# Altium PCB PCB1.2.PcbDoc (part 1 of 2)
Units mm, origin at the board's own origin, x right, y up, seen from the top; angles counter-clockwise.
Board outline 43 x 43 mm, 4 copper layers (Top Layer, Mid-Layer 1, Mid-Layer 2, Bottom Layer); 150 components, 103 nets, 523 pads, 244 vias.
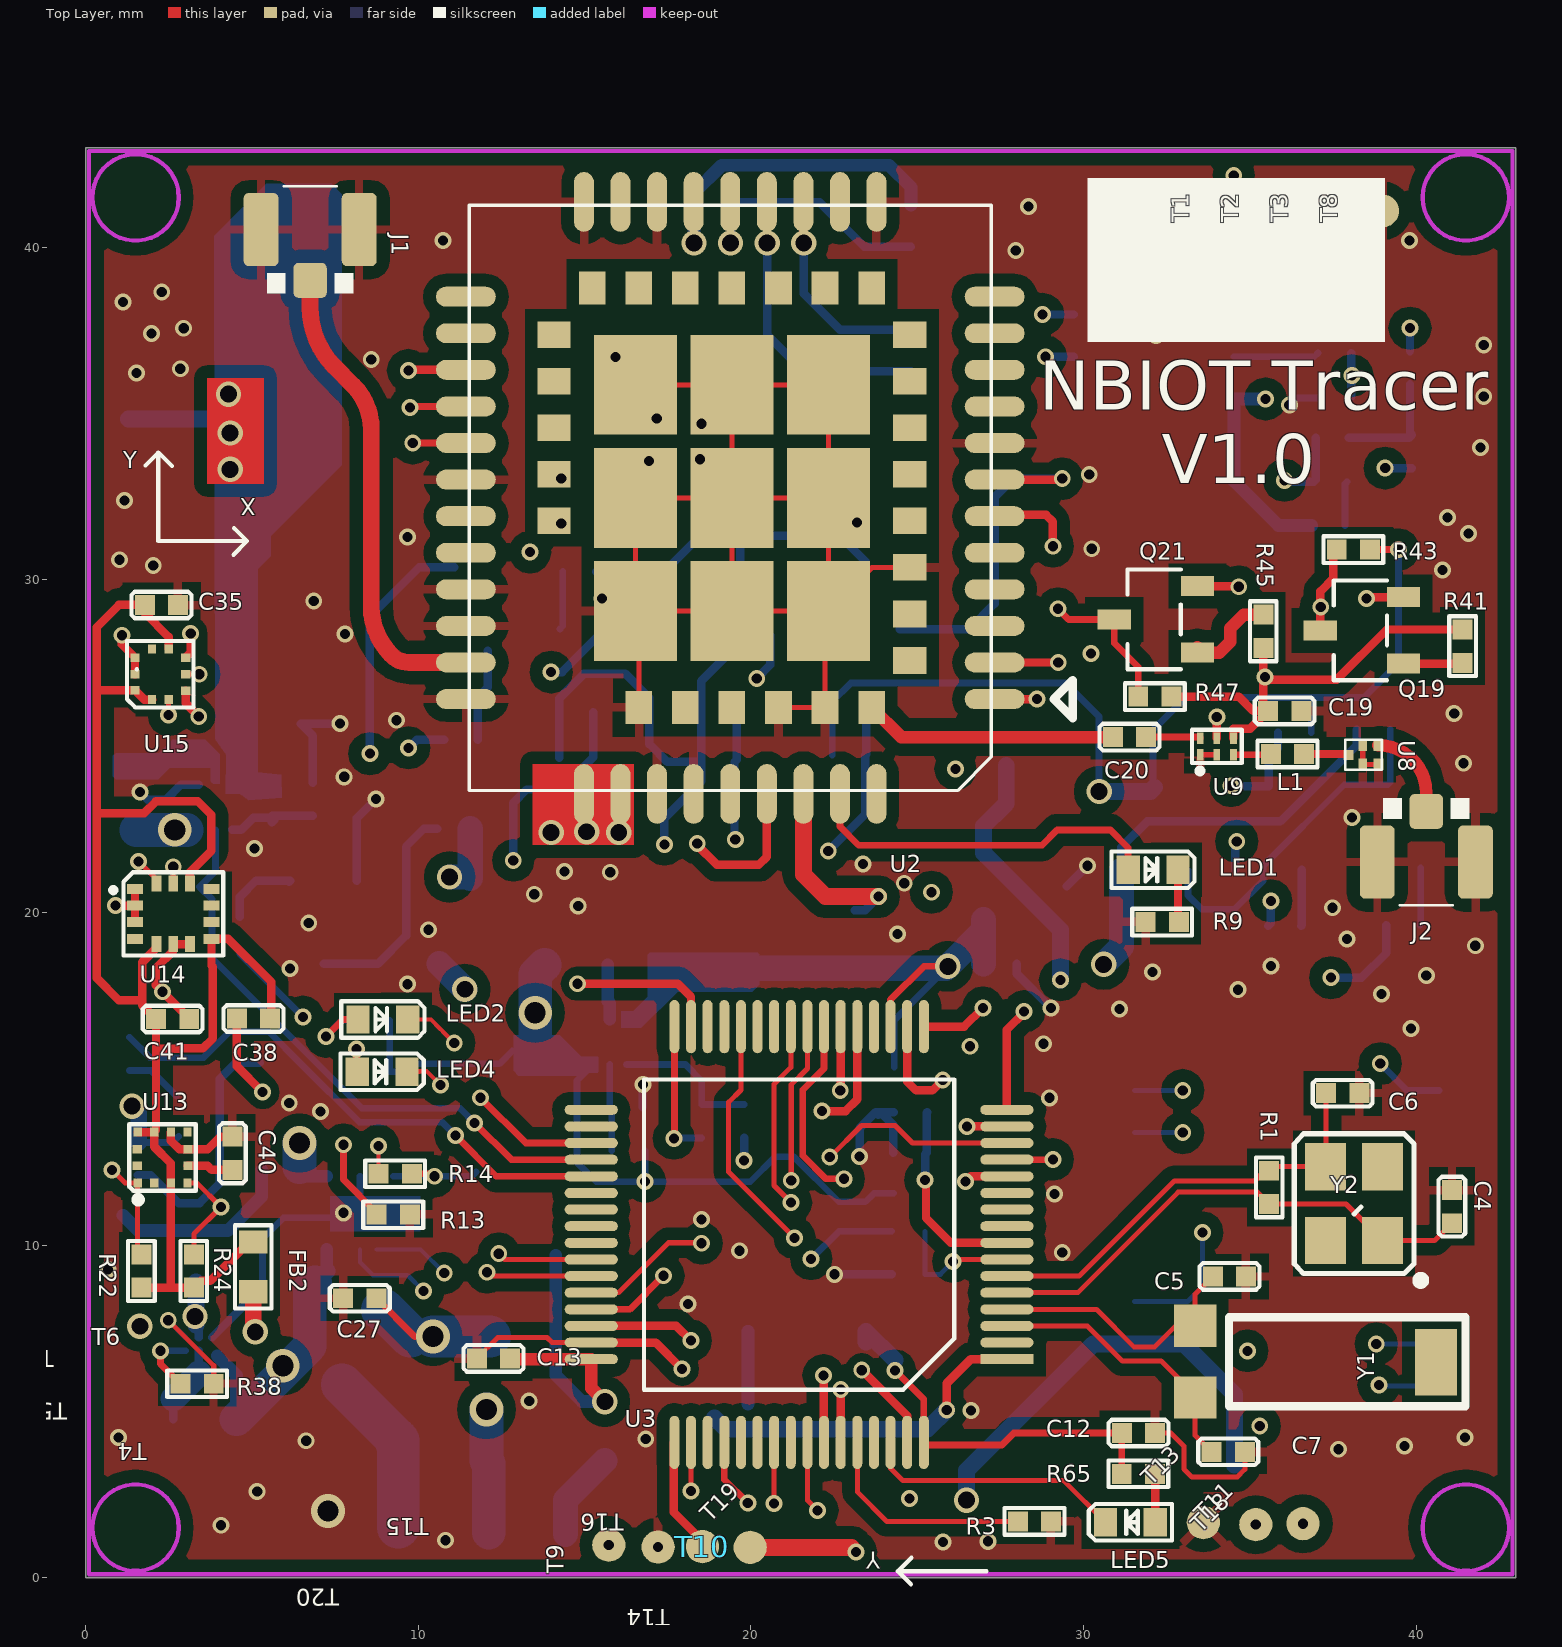
[diagram p0: Top Layer view]
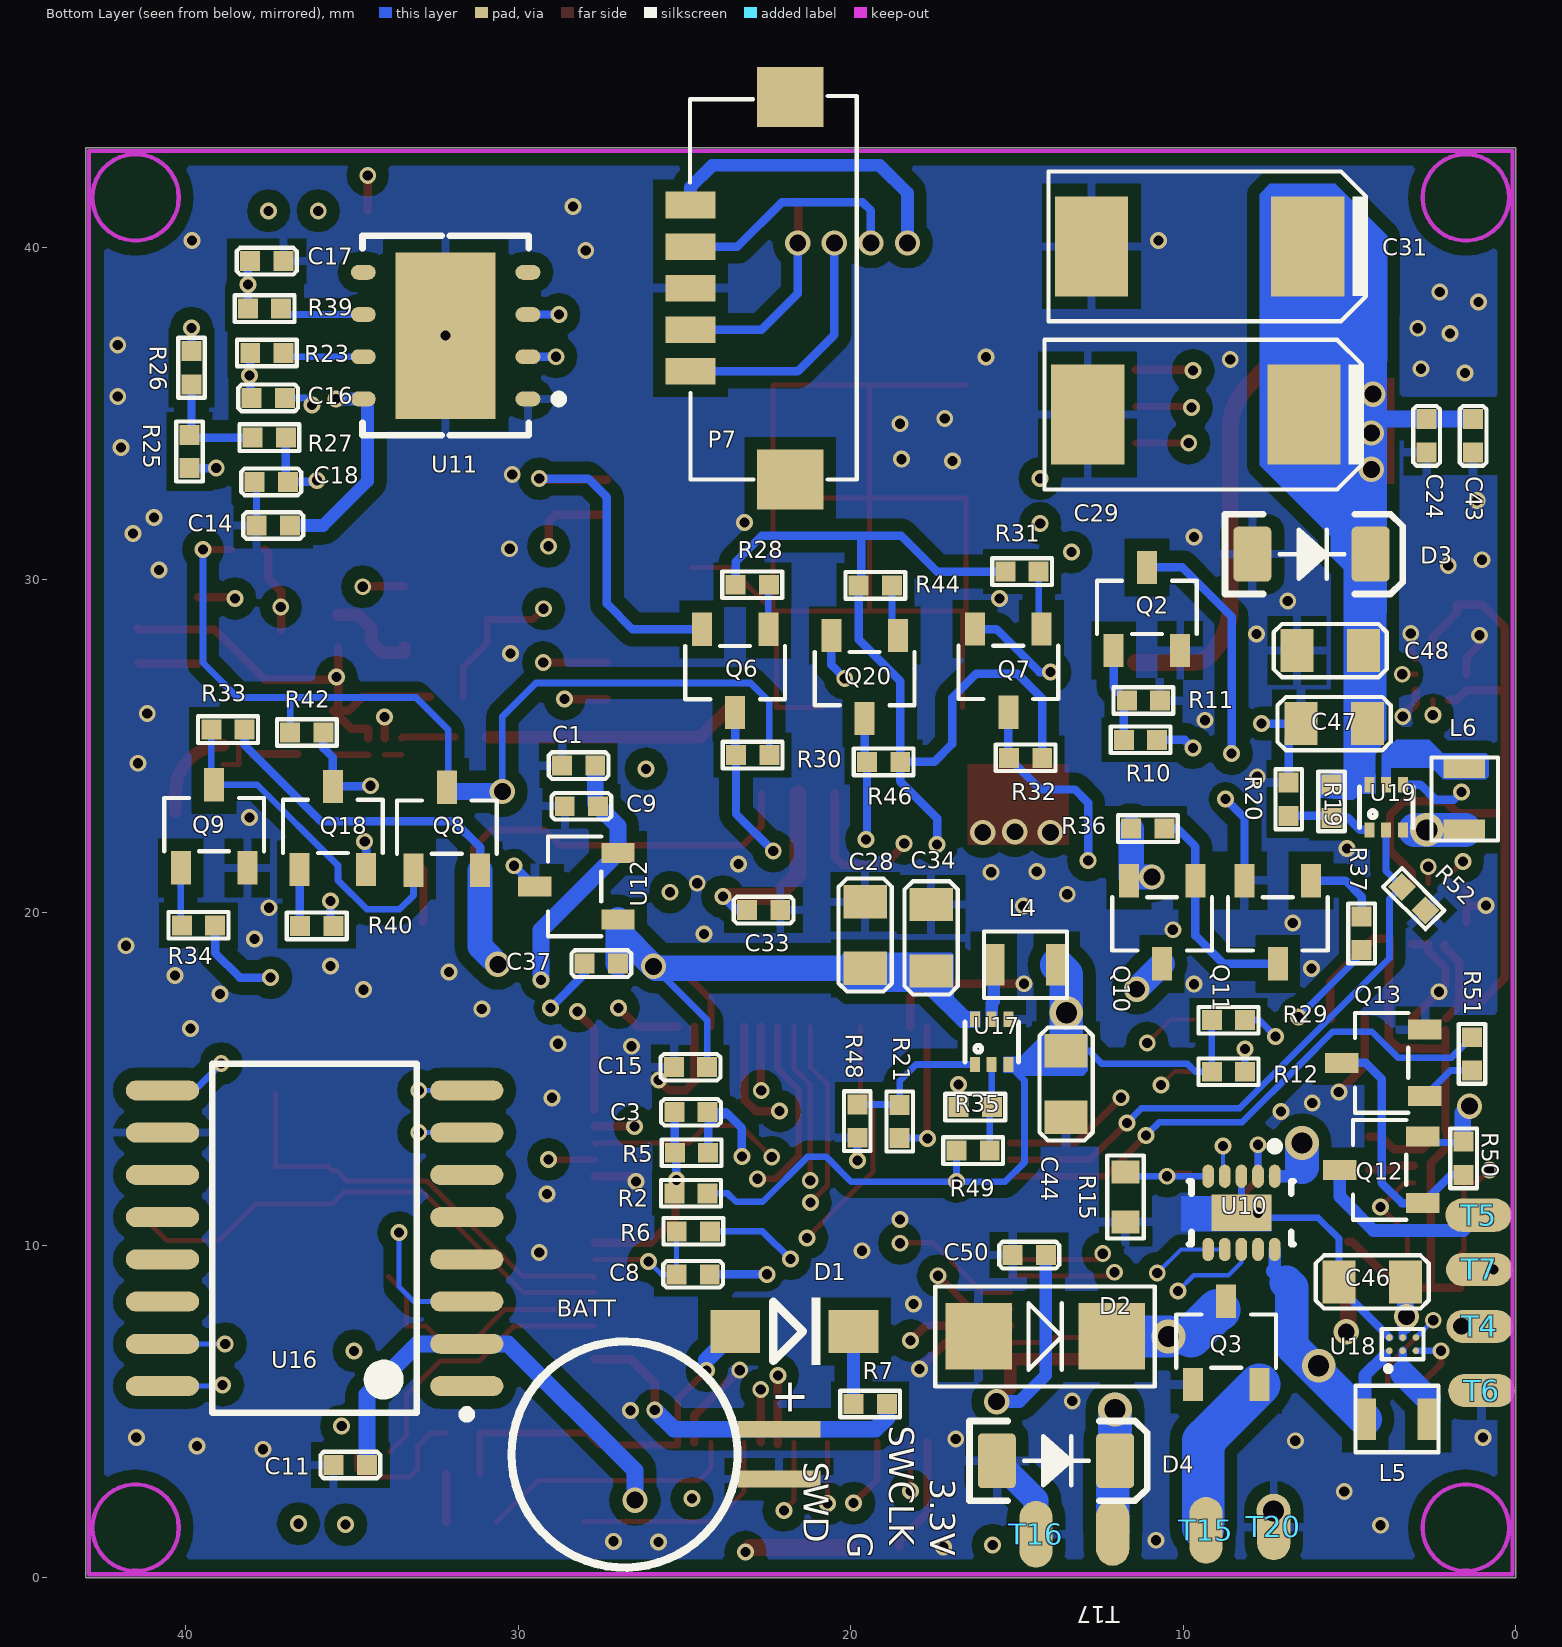
[diagram p1: Bottom Layer view, seen from below]
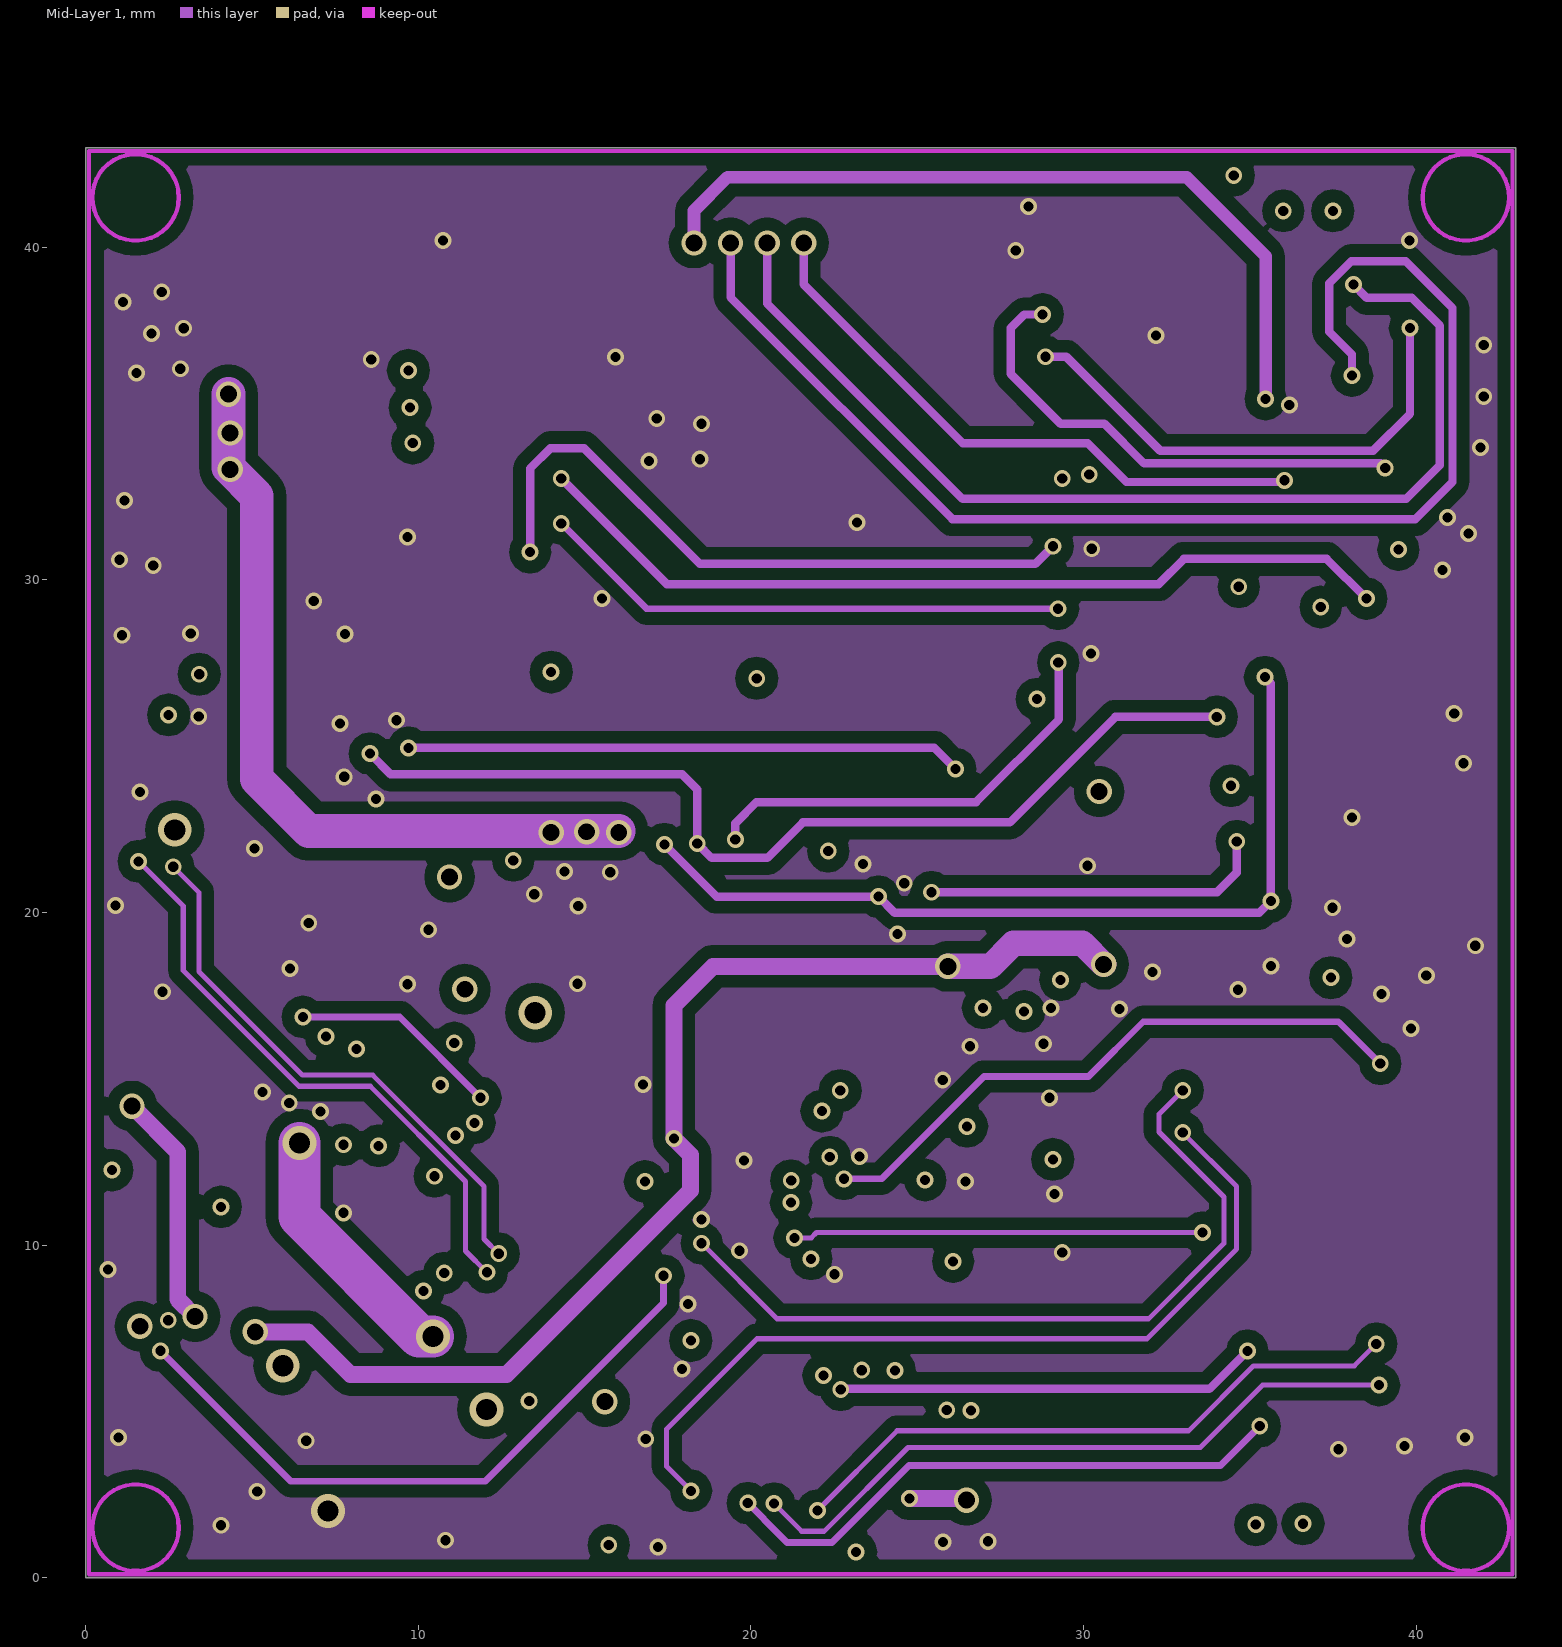
[diagram p2: Mid-Layer 1]
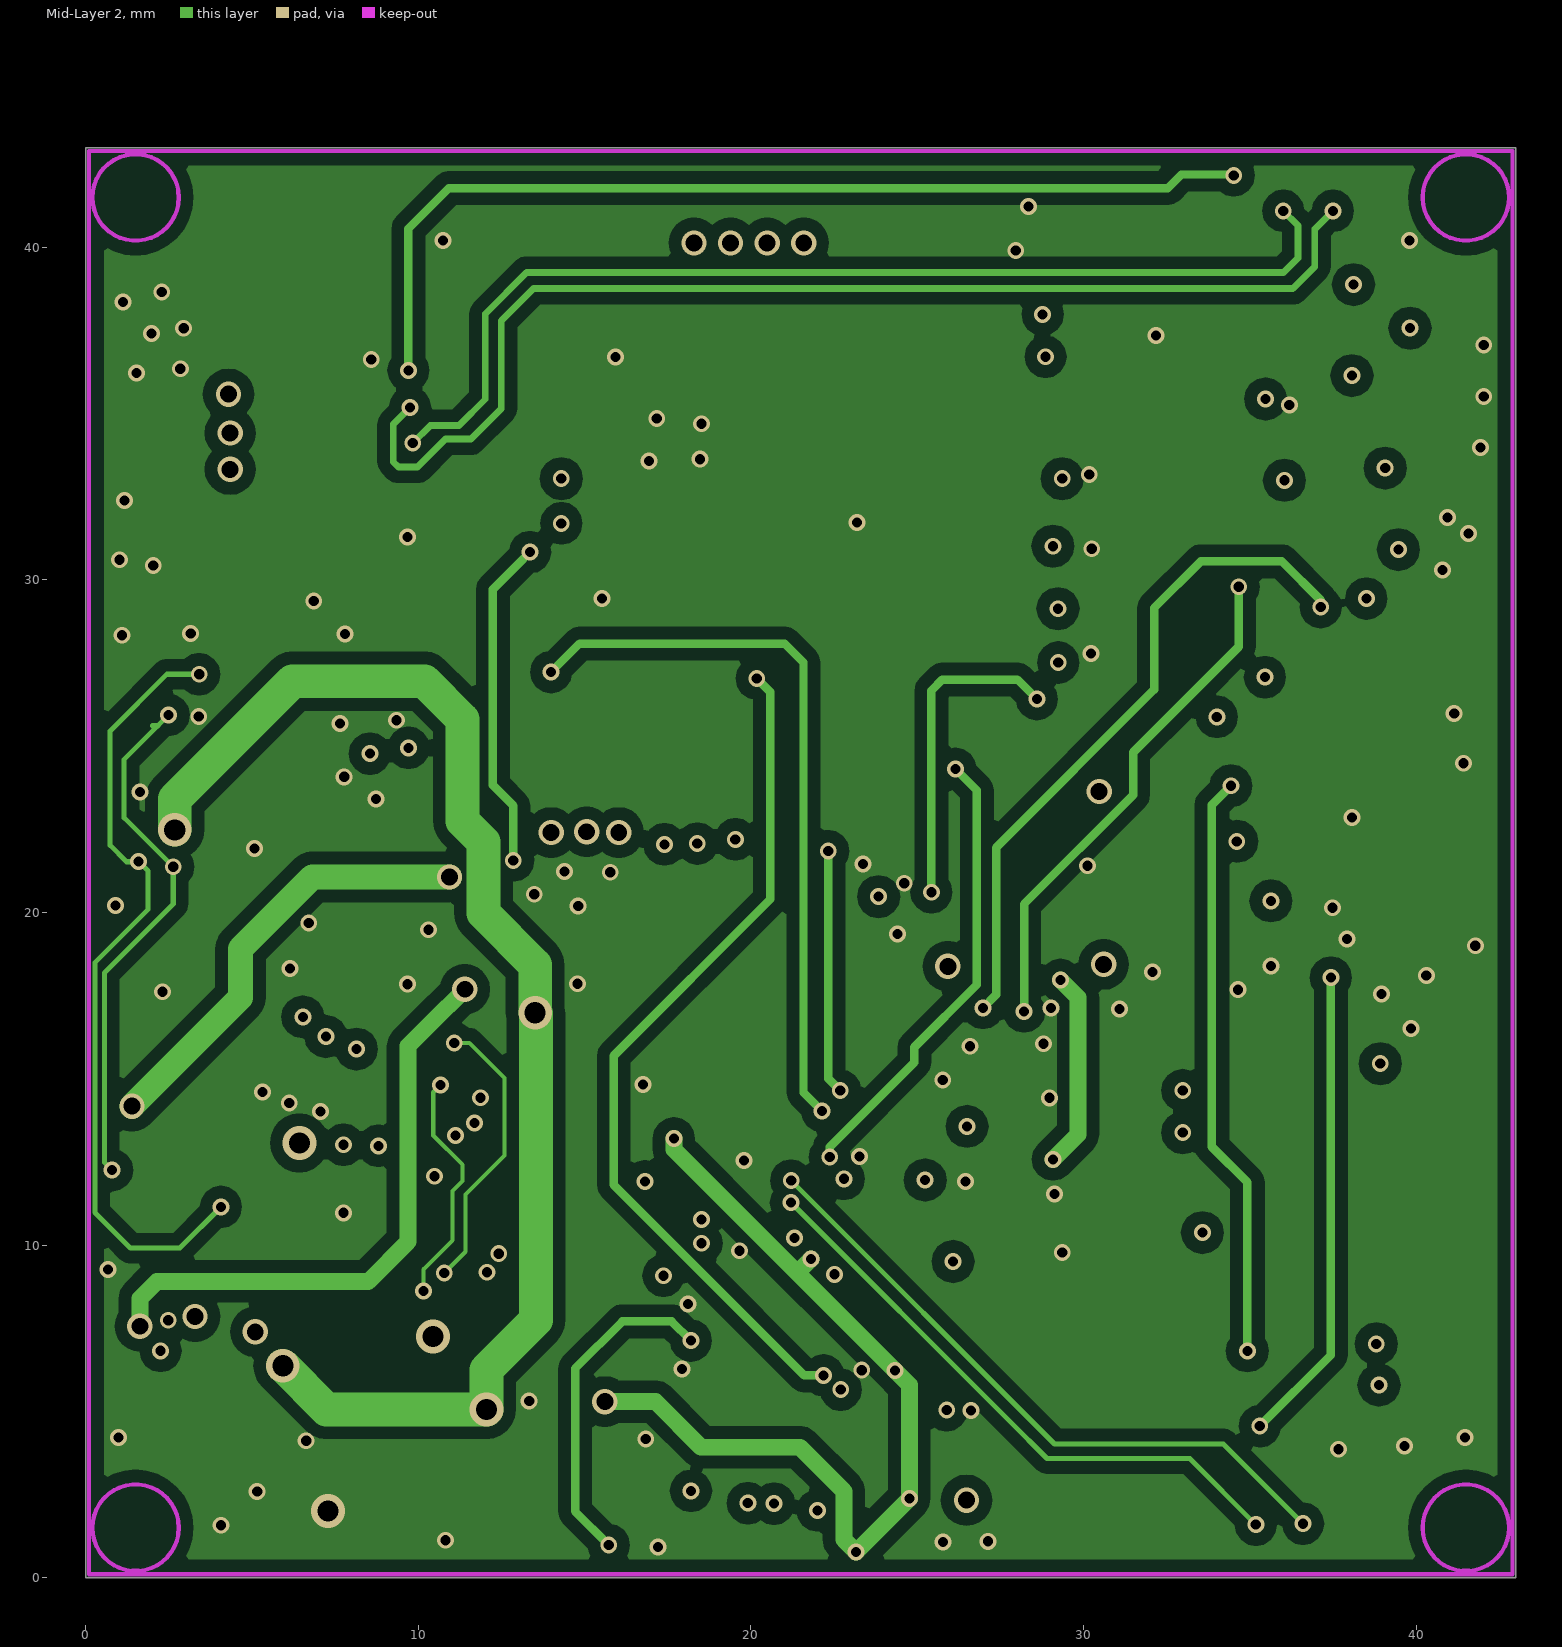
[diagram p3: Mid-Layer 2]

## Layer stack, top to bottom
Top Layer: signal copper 0.0356
Dielectric: core 0.32, FR-4, Dk 4.8
Mid-Layer 1: signal copper 0.0356
Dielectric: prepreg 0.32, FR-4, Dk 4.8
Mid-Layer 2: signal copper 0.0356
Dielectric: core 0.32, FR-4, Dk 4.8
Bottom Layer: signal copper 0.0356

## Board outline
0,0 0,43 43,43 43,0

## Design rules (kind name [scope] priority, off if disabled: settings)
Clearance [InPolygon  And InNet(AGND)] p1: gap=0.381
Clearance Clearance_1 [All] p2: gap=0.127
HoleToHoleClearance [All] p1: gap=0.127 allowstackedmicrovias=TRUE
MinimumSolderMaskSliver [All] p1: minsoldermaskwidth=0.025
PolygonConnect PolygonConnect_1 [InNet('AGND') And IsVia] p1: connectstyle=Direct reliefconductorwidth=0.254 reliefentries=4 polygonreliefangle="90 Angle"
PolygonConnect [All] p2: connectstyle=Relief reliefconductorwidth=0.254 reliefentries=4 polygonreliefangle="90 Angle"
RoutingVias [All] p1: holewidth=0.711 width=1.27 viastyle="Through Hole" minholewidth=0.711 minwidth=1.27 maxholewidth=0.711 maxwidth=1.27
SilkToSilkClearance [All] p1: silktosilkclearance=0.127
SilkscreenOverComponentPads [All] p1: minsilkscreentomaskgap=0.025
SolderMaskExpansion [All] p1: expansion=0.102
Width [All] p1: maxlimit=5.08 minlimit=0.127 preferedwidth=0.254
24 further rules are at their usual default settings.

## Classes and differential pairs
component class NBIOT: U2
component class CPU: BATT C3 C4 C5 C6 C7 C8 C9 C11 C12 C13 C15 C50 D1 LED5 R1 R2 R3 R5 R6 R7 R65 T9 T10 T11 T13 T14 T18 T19 U3 U16 U? Y1 Y2
component class GPS&&lte2: C14 C16 C17 C18 C19 C20 C24 C29 C31 C33 C43 D3 J1 J2 L1 LED1 P7 Q2 Q6 Q7 Q18 Q19 Q20 Q21 R9 R10 R11 R23 R25 R26 R27 R28 R30 R31 R32 R39 R40 R41 R42 R43 R44 R45 R46 R47 T1 T2 T3 T8 U8 U9 U11
component class power: C1 C27 C28 C34 C37 C44 C46 C47 C48 D2 D4 L4 L5 L6 LED2 LED4 Q3 Q8 Q9 Q10 Q11 Q12 Q13 R12 R13 R14 R15 R19 R20 R21 R29 R33 R34 R35 R36 R37 R38 R48 R49 R50 R51 R52 T4 T5 T6 T7 T15 T16 T17 T20 U10 U12 U17 U18 U19
component class sensors: C35 C38 C40 C41 FB2 R22 R24 U13 U14 U15

## Components (designator, comment, footprint, x,y, rotation, side; value= is the part's Value field where it differs from the comment)
BATT "MS621FE" MS621FE 22.149,3.714 r180 bottom
C1 "0.1uF/25V" 0402c 27.679,24.417 r0 bottom
C3 "0.1uF/25v" 0402c 25.299,13.994 r180 bottom
C4 "22pF" 0402c 41.079,11.656 r270 top
C5 "6pF" 0402c 33.894,9.059 r0 top
C6 "22pF" 0402c 38.295,14.566 r180 top
C7 "6pF" 0402c 33.853,3.783 r0 top
C8 "0.1uF/25V" 0402C 24.235,9.12 r0 bottom
C9 "0.1uF/25V" 0402C 28.595,23.195 r180 bottom
C11 "0.1uF/25V" 0402C 35.544,3.386 r180 bottom
C12 "0.1uF/25V" 0402C 32.154,4.348 r180 top
C13 "0.1uF/25V" 0402C 11.76,6.593 r0 top
C14 "0.1uF" 0402C 37.861,31.636 r180 bottom
C15 "0.1uF/25V" 0402C 25.314,15.348 r180 bottom
C16 "10pF/NC" 0402C 37.014,35.472 r0 bottom
C17 "10pF/NC" 0402C 37.057,39.584 r0 bottom
C18 "10pF/NC" 0402C 37.922,32.948 r180 bottom
C19 "0.1uF" 0402C 36.551,26.06 r180 top
C20 "36pF" 0402c 30.886,25.273 r0 top
C24 "10pF" 0402C 2.68,33.833 r90 bottom
C27 "1uF/25V" 0402C 8.741,8.401 r180 top
C28 "22uF/10V" 0805C 19.561,18.321 r90 bottom
C29 "1000uF" 7343 6.371,34.972 r0 bottom
C31 "1000uF" 7343 6.254,40.028 r0 bottom
C33 "0.1uF/25V" 0402C 22.117,20.072 r0 bottom
C34 "22uF/10V" 0805C 17.577,18.238 r90 bottom
C35 "0.1uF/25V" 0402C 2.778,29.246 r180 top
C37 "0.1uF/25V" 0402c 26.996,18.462 r0 bottom
C38 "0.1uF/25V" 0402C 4.544,16.811 r0 top
C40 "22pF" 0402c 4.411,12.259 r90 top
C41 "0.1uF/25V" 0402C 3.113,16.797 r180 top
C43 "33pF" 0402C 1.283,33.833 r90 bottom
C44 "22uF/10V" 0805C 13.52,15.841 r270 bottom
C46 "22uF/10V" 0805C 3.317,8.891 r0 bottom
C47 "22uF/10V" 0805C 4.462,25.679 r0 bottom
C48 "22uF/10V" 0805C 4.58,27.874 r0 bottom
C50 "0.1uF/25V" 0402C 15.129,9.697 r180 bottom
D1 "1N4148" DIODE_SOP 23.468,7.404 r180 bottom
D2 "SMAJ12CA" SMA 16.153,7.251 r180 bottom
D3 "DIODE_SCHOTTKY_0" LL-34(D1206) 6.142,30.774 r180 bottom
D4 "DIODE_SCHOTTKY_0" LL-34(D1206) 13.825,3.513 r180 bottom
FB2 "10R/1A" 0603R 5.037,8.594 r90 top
J1 "IPEX" RF-UFL 6.748,40.533 r0 top
J2 "IPEX" RF-UFL 40.31,21.514 r180 top
L1 "LQW15A" 0402R 35.636,24.765 r0 top
L4 "SRP4020TA-1R0M" L2520 15.7,18.422 r180 bottom
L5 "SRP4020TA-2R2M" L2520 4.532,4.762 r180 bottom
L6 "SRP4020TA-1R0M" L2520 1.544,24.373 r270 bottom
LED1 "LED" 0603LED 31.344,21.285 r0 top
LED2 "LED" 0603LED 8.187,16.781 r0 top
LED4 "LED" 0603LED 8.164,15.211 r0 top
LED5 "LED" 0603LED 32.161,1.664 r180 top
P7 "Header 5" 5×1.25mmSMT 24.816,36.271 r90 bottom
Q2 "MMBT3904" SOT23-3 12.09,27.876 r270 bottom
Q3 "Si2369DS" sot23-3 9.707,5.81 r270 bottom
Q6 "MMBT3904" SOT23-3 22.474,28.514 r90 bottom
Q7 "MMBT3904" SOT23-3 14.259,28.521 r90 bottom
Q8 "Si2369DS" sot23-3 33.143,21.266 r270 bottom
Q9 "S8050" SOT23-3 40.141,21.342 r270 bottom
Q10 "Si2369DS" sot23-3 9.633,20.957 r90 bottom
Q11 "S8050" SOT23-3 6.156,20.957 r90 bottom
Q12 "Si2369DS" sot23-3 2.794,11.263 r180 bottom
Q13 "S8050" SOT23-3 2.736,14.479 r180 bottom
Q18 "MMBT3904" SOT23-3 36.569,21.29 r270 bottom
Q19 "MMBT3904" SOT23-3 39.624,27.483 r0 top
Q20 "MMBT3904" SOT23-3 18.578,28.331 r90 bottom
Q21 "MMBT3904" SOT23-3 33.426,27.813 r0 top
R1 "1MR" 0402R 35.585,11.235 r90 top
R2 "10K/1%" 0402R 24.299,11.556 r0 bottom
R3 "100K" 0402R 28.027,1.691 r0 top
R5 "10K/1%" 0402R 25.283,12.775 r180 bottom
R6 "10K" 0402R 24.228,10.413 r0 bottom
R7 "470" 0402R 19.912,5.22 r180 bottom
R9 "1K" 0402R 32.868,19.71 r180 top
R10 "4.7K" 0402R 11.782,25.191 r180 bottom
R11 "47K" 0402R 11.697,26.374 r180 bottom
R12 "1K/1%" 0402R 9.139,15.211 r180 bottom
R13 "3.95K/1%" 0402R 8.748,10.912 r0 top
R14 "21.5k/1%" 0402R 9.805,12.144 r180 top
R15 "RTH103AT" 0603R 11.737,10.694 r90 bottom
R19 "534K/1%" 0402R 5.54,23.843 r270 bottom
R20 "100K/1%" 0402R 6.829,23.906 r270 bottom
R21 "400K/1%" 0402R 18.524,13.215 r90 bottom
R22 "4.7K" 0402R 1.676,8.72 r90 top
R23 "10R" 0402R 38.052,36.823 r180 bottom
R24 "4.7K" 0402R 3.251,9.72 r270 top
R25 "0R" 0402R 39.88,33.363 r90 bottom
R26 "0R" 0402R 39.819,36.878 r270 bottom
R27 "10R" 0402R 36.979,34.279 r0 bottom
R28 "4.7K" 0402R 22.457,29.855 r0 bottom
R29 "1K/1%" 0402R 9.139,16.761 r180 bottom
R30 "10K" 0402R 23.446,24.732 r180 bottom
R31 "4.7K" 0402R 14.344,30.25 r0 bottom
R32 "4.7K" 0402R 15.238,24.65 r180 bottom
R33 "4K7" 0402R 38.223,25.499 r0 bottom
R34 "4K7" 0402R 40.109,19.614 r180 bottom
R35 "10K/1%" 0402R 16.754,14.148 r180 bottom
R36 "4K7" 0402R 11.564,22.521 r180 bottom
R37 "4K7" 0402R 4.637,19.873 r270 bottom
R38 "10K/1%" 0402R 3.851,5.829 r180 top
R39 "10R" 0402R 38.121,38.156 r180 bottom
R40 "4.7K" 0402R 36.553,19.597 r180 bottom
R41 "4.7K" 0402R 41.402,27.508 r90 top
R42 "10K" 0402R 35.851,25.411 r0 bottom
R43 "10K" 0402R 37.617,30.912 r0 top
R44 "4.7K" 0402R 18.757,29.836 r0 bottom
R45 "4.7K" 0402R 35.408,28.956 r270 top
R46 "4.7K" 0402R 19.508,24.528 r180 bottom
R47 "4.7K" 0402R 31.648,26.492 r0 top
R48 "100K/1%" 0402R 19.799,13.226 r90 bottom
R49 "13K/1%" 0402R 16.817,12.839 r180 bottom
R50 "4K7" 0402R 1.568,13.107 r270 bottom
R51 "4K7" 0402R 1.317,15.249 r90 bottom
R52 "10K/1%" 0402R 2.716,20.064 r45 bottom
R65 "1K" 0402R 32.152,3.122 r180 top
T1 "TPD" TPD 34.519,41.097 r90 top
T2 "TPD" TPD 36.009,41.097 r90 top
T3 "TPD" TPD 37.499,41.097 r90 top
T4 "TPD" TP#1 1.085,7.554 r180 top
T5 "TPD" TP#1 1.119,10.897 r180 top
T6 "TPD" TP#1 1.031,5.624 r0 top
T7 "TPD" TP#1 1.096,9.267 r180 top
T8 "TPD" TPD 38.989,41.097 r90 top
T9 "TPD" TPd 15.729,0.977 r90 top
T10 "TPD" TPd 18.544,0.932 r270 top
T11 "TPD" TPd 36.602,1.622 r135 top
T13 "TPD" TPd 33.605,1.654 r135 top
T14 "TPD" TPd 17.213,0.921 r270 top
T15 "TPD" TP#1 9.312,1.421 r270 top
T16 "TPD" TP#1 14.425,1.304 r270 top
T17 "TPD" TP#2 12.12,1.355 r270 bottom
T18 "TPD" TPd 35.183,1.593 r135 top
T19 "TPD" TPd 19.98,0.911 r135 top
T20 "TPD" TP#1 7.277,1.526 r270 top
U2 "SIM7080G" SIM868 27.33,26.416 r180 top
U3 "stm32l412r8t6" LQFP-64 27.701,6.567 r180 top
U8 "SAFFB1G56KB0F0A" SAFFB1G56KB0F0A 37.973,24.74 r0 top
U9 "AW5005DNR" AW5005 34.011,24.994 r90 top
U10 "bq24210" QFN50P200X300X80-10N 8.25,10.969 r270 bottom
U11 "SLI76CF3600P" QFN127P500X600X80-8N 32.177,37.345 r0 bottom
U12 "REF3025AIDBZR" SOT23-3 26.996,19.783 r180 bottom
U13 "LIS2MDL" LIS2MDL 2.312,12.633 r90 top
U14 "LSM6DS3TR" LSM6DS3TR-C 2.633,19.959 r0 top
U15 "BMP388" BMP388 2.245,27.164 r180 top
U16 "MX25L51245GMI-10G" SOP127P1030X239-16N 36.116,10.205 r0 bottom
U17 "TPS61023" SOT563-6 15.761,16.102 r180 bottom
U18 "TPS610997YFFR" TPS610997YFFR 3.402,7.02 r90 bottom
U19 "TPS61023" SOT563-6 3.901,23.157 r180 bottom
Y1 "MC-146 32.768K/6pF" 32.768K 33.36,5.413 r90 top
Y2 "8MHz" OSCILLATOR-3.2X2.5 38.142,11.239 r90 top

## Footprints (in the part's own frame and the unit in brackets; to place one, negate y for a bottom-side part, rotate by r counter-clockwise, add the part's x,y. Pads: shape width x height; smd on the part's side, far side on the other; paste and mask are expansions set on the pad)
5×1.25mmSMT [mm]
  rect 1.8x2 smd: 0(-3.25,-3) 0(8.25,-3)
  rect 0.8x1.5 smd: 1(0,0) 2(1.25,0) 3(2.5,0) 4(3.75,0) 5(5,0)
  round 0.5 on Bottom Overlay: ""(-0.875,0.432)
  silkscreen extent -3.25,-5 8.28,0.02
32.768K [mm]
  rect 1.27x1.27 smd: 1(0,0) 2(2.159,0)
  rect 2x1.27 smd: 3(1.07,-7.239)
  silkscreen extent -0.25,-8.13 2.41,-1.02
0402c [mm]
  rect 0.6x0.6 smd: 1(0,0) 2(1,0)
  silkscreen extent -0.4,-0.4 1.4,0.4
0402C [mm]
  rect 0.6x0.6 smd: 1(0,0) 2(1,0)
  silkscreen extent -0.4,-0.4 1.4,0.4
0402R [mm]
  rect 0.6x0.6 smd: 1(0,0) 2(1,0)
  silkscreen extent -0.4,-0.4 1.4,0.4
0603LED [mm]
  rect 0.7x0.85 smd: 1(0,0) 2(1.5,0)
  silkscreen extent -0.5,-0.55 2,0.55
0603R [mm]
  rect 0.7x0.85 smd: 1(0,0) 2(1.5,0)
  silkscreen extent -0.5,-0.55 2,0.55
0805C [mm]
  rect 1x1.3 smd: 1(0,0) 2(2,0)
  silkscreen extent -0.7,-0.8 2.7,0.8
7343 [mm]
  rect 2.2x3 smd: 1(0,0) 2(6.5,0)
  silkscreen extent -1.75,-2.25 7.8,2.25
AW5005 [mm]
  rect 0.35x0.2 smd: 1(-0.25,0.5) 2(-0.25,0) 3(-0.25,-0.5) 4(0.25,-0.5) 5(0.25,0) 6(0.25,0.5)
  silkscreen extent -0.77,-0.75 0.5,0.75
BMP388 [mm]
  rect 0.25x0.275 smd: 1(0.25,0.763) 2(-0.25,0.763) 6(-0.25,-0.763) 7(0.25,-0.763)
  rect 0.275x0.25 smd: 3(-0.762,0.5) 4(-0.762,0) 5(-0.762,-0.5) 8(0.763,-0.5) 9(0.763,0) 10(0.763,0.483)
  silkscreen extent -1,-1 1,1
DIODE_SOP [mm]
  rect 1.5x1.3 smd: 1(0,0) 2(3.556,0)
  silkscreen extent 1.14,-1.02 2.56,1.02
L2520 [mm]
  rect 0.65x1.25 smd: 1(0,0) 2(1.9,0)
  silkscreen extent -0.29,-0.99 2.21,1.01
LIS2MDL [mm]
  rect 0.275x0.25 smd: 1(-0.763,0.75) 2(-0.763,0.25) 3(-0.763,-0.25) 4(-0.763,-0.75) 7(0.763,-0.75) 8(0.763,-0.25) 9(0.763,0.25) 10(0.763,0.75)
  rect 0.25x0.275 smd: 5(-0.25,-0.763) 6(0.25,-0.763) 11(0.25,0.762) 12(-0.25,0.762)
  silkscreen extent -1.35,-1 1,1
LL-34(D1206) [mil]
  rrect25% 45x65 smd: 1(-70,0) 2(70,0)
  silkscreen extent -102,-47 108,47, body extent -70,-28 68,30, height 56
LQFP-64 [mm]
  rect 1.6x0.3 smd: 1(0,0)
  oval 1.6x0.3 smd: 2(0,-0.5) 3(0,-1) 4(0,-1.5) 5(0,-2) 6(0,-2.5) 7(0,-3) 8(0,-3.5) 9(0,-4) 10(0,-4.5) 11(0,-5) 12(0,-5.5) 13(0,-6) 14(0,-6.5) 15(0,-7) 16(0,-7.5) 33(12.5,-7.5) 34(12.5,-7) 35(12.5,-6.5) 36(12.5,-6) 37(12.5,-5.5) 38(12.5,-5) 39(12.5,-4.5) 40(12.5,-4) 41(12.5,-3.5) 42(12.5,-3) 43(12.5,-2.5) 44(12.5,-2) 45(12.5,-1.5) 46(12.5,-1) 47(12.5,-0.5) 48(12.5,0)
  oval 0.3x1.6 smd: 17(2.5,-10) 18(3,-10) 19(3.5,-10) 20(4,-10) 21(4.5,-10) 22(5,-10) 23(5.5,-10) 24(6,-10) 25(6.5,-10) 26(7,-10) 27(7.5,-10) 28(8,-10) 29(8.5,-10) 30(9,-10) 31(9.5,-10) 32(10,-10) 49(10,2.5) 50(9.5,2.5) 51(9,2.5) 52(8.5,2.5) 53(8,2.5) 54(7.5,2.5) 55(7,2.5) 56(6.5,2.5) 57(6,2.5) 58(5.5,2.5) 59(5,2.5) 60(4.5,2.5) 61(4,2.5) 62(3.5,2.5) 63(3,2.5) 64(2.5,2.5)
  silkscreen extent 1.59,-8.41 10.91,0.91
LSM6DS3TR-C [mm]
  rect 0.48x0.3 smd: 1(-1.15,0.75) 2(-1.15,0.25) 3(-1.15,-0.25) 4(-1.15,-0.75) 8(1.15,-0.75) 9(1.15,-0.25) 10(1.15,0.25) 11(1.15,0.75)
  rect 0.3x0.48 smd: 5(-0.5,-0.91) 6(0,-0.91) 7(0.5,-0.91) 12(0.5,0.91) 13(0,0.91) 14(-0.5,0.91)
  silkscreen extent -1.83,-1.25 1.5,1.25
MS621FE [mm]
  rect 2.5x0.5 smd: 1(0,-0.749) 2(0,0.749)
  silkscreen extent -8.05,-3.41 -1.25,3.39
OSCILLATOR-3.2X2.5 [mil] "OSCILLATOR-3.2X2.5"
  rect 56x48 smd: 1(-43.31,-33.46) 2(44,-33.46) 3(44,34) 4(-43.31,34)
  silkscreen extent -95,-83 83,71
QFN50P200X300X80-10N [mm] "QFN, 10-Leads, Body 2.9x1.9mm (max), Pitch 0.50mm, IPC Medium Density"
  oval 0.7x0.35 smd: 1(-1.1,1) 2(-1.1,0.5) 3(-1.1,0) 4(-1.1,-0.5) 5(-1.1,-1) 6(1.1,-1) 7(1.1,-0.5) 8(1.1,0) 9(1.1,0.5) 10(1.1,1)
  rect 1.1x1.8 smd: 11(0,0)
  silkscreen extent -2.12,-1.58 0.95,1.58, body extent -0.95,-1.45 0.95,1.45, height 0.8
QFN127P500X600X80-8N [mm] "QFN, 8-Leads, Body 6.0x5.0mm (max), Pitch 1.27mm, IPC Medium Density"
  oval 0.75x0.45 smd: 1(-2.475,1.905) 2(-2.475,0.635) 3(-2.475,-0.635) 4(-2.475,-1.905) 5(2.475,-1.905) 6(2.475,-0.635) 7(2.475,0.635) 8(2.475,1.905)
  rect 3x5 smd: 9(0,0)
  silkscreen extent -3.52,-3 2.5,3
RF-UFL [mm]
  rrect30% 1x1.05 smd: 1(0,-1.525)
  rrect30% 1.05x2.2 smd: 2(-1.475,0) 2(1.475,0)
  silkscreen extent -1.3,-1.93 1.3,1.3, body extent -1.7,-1.55 1.7,1.55, height 1.25
SAFFB1G56KB0F0A [mm]
  rect 0.3x0.3 smd: 1(0,0)
  rect 0.25x0.35 smd: 2(0.425,-0.287) 5(0.425,0.288)
  rect 0.3x0.35 smd: 3(0.9,-0.287) 4(0.9,0.288)
  silkscreen extent -0.1,-0.44 1,0.46
SIM868 [mm]
  oval 1.8x0.6 smd: 1(0,0) 2(0,-1.1) 3(0,-2.2) 4(0,-3.3) 5(0,-4.4) 6(0,-5.5) 7(0,-6.6) 8(0,-7.7) 9(0,-8.8) 10(0,-9.9) 11(0,-11) 12(0,-12.1) 22(15.9,-12.1) 23(15.9,-11) 24(15.9,-9.9) 25(15.9,-8.8) 26(15.9,-7.7) 27(15.9,-6.6) 28(15.9,-5.5) 29(15.9,-4.4) 30(15.9,-3.3) 31(15.9,-2.2) 32(15.9,-1.1) 33(15.9,0)
  oval 0.6x1.8 smd: 13(3.55,-14.95) 14(4.65,-14.95) 15(5.75,-14.95) 16(6.85,-14.95) 17(7.95,-14.95) 18(9.05,-14.95) 19(10.15,-14.95) 20(11.25,-14.95) 21(12.35,-14.95) 34(12.35,2.85) 35(11.25,2.85) 36(10.15,2.85) 37(9.05,2.85) 38(7.95,2.85) 39(6.85,2.85) 40(5.75,2.85) 41(4.65,2.85) 42(3.55,2.85)
  rect 1x0.8 smd: 43(2.549,-1.159) 44(2.549,-2.559) 45(2.549,-3.959) 46(2.549,-5.359) 47(2.549,-6.759) 48(2.549,-8.159) 49(2.549,-9.559) 50(2.549,-10.959) 58(13.251,-10.959) 59(13.251,-9.559) 60(13.251,-8.159) 61(13.251,-6.759) 62(13.251,-5.359)
  rect 0.8x1 smd: 51(3.7,-12.359) 52(5.1,-12.359) 53(6.5,-12.359) 54(7.9,-12.359) 55(9.3,-12.359) 56(10.7,-12.359) 57(12.1,-12.359) 63(10.7,0.25) 64(9.3,0.25) 65(7.9,0.25) 66(6.5,0.25) 67(5.1,0.25) 68(3.7,0.25)
  rect 2.5x3 smd: 69(5,-2.65) 70(5,-6.05) 71(5,-9.45) 72(7.9,-9.45) 73(10.8,-9.45) 74(10.8,-6.05) 75(10.8,-2.65) 76(7.9,-2.65) 77(7.9,-6.05)
  silkscreen extent -2.35,-14.85 15.8,2.75
SMA [mm]
  rect 2x2 smd: 1(0,0) 2(4,0)
  silkscreen extent -1.3,-1.5 5.3,1.5
SOP127P1030X239-16N [mm] "SOP, 16-Leads, Body 10.5x7.6mm (max), Pitch 1.27mm, IPC Medium Density"
  oval 2.2x0.6 smd: 1(-4.575,4.445) 2(-4.575,3.175) 3(-4.575,1.905) 4(-4.575,0.635) 5(-4.575,-0.635) 6(-4.575,-1.905) 7(-4.575,-3.175) 8(-4.575,-4.445) 9(4.575,-4.445) 10(4.575,-3.175) 11(4.575,-1.905) 12(4.575,-0.635) 13(4.575,0.635) 14(4.575,1.905) 15(4.575,3.175) 16(4.575,4.445)
  silkscreen extent -4.7,-5.25 3.07,5.42, body extent -3.8,-5.25 3.8,5.25, height 2.39
SOT23-3 [mm]
  rect 1x0.6 smd: 1(0,0) 2(0,2) 3(-2.5,1)
  silkscreen extent -2.1,-0.5 -0.5,2.5
sot23-3 [mm]
  rect 1x0.6 smd: 1(0,0) 2(0,2) 3(-2.5,1)
  silkscreen extent -2.1,-0.5 -0.5,2.5
SOT563-6 [mil] "SOT563-6"
  rect 12x18 smd: 1(-19.69,-26.57) 2(0,-26.57) 3(20,-26.57) 4(20,27) 5(0,27) 6(-19.69,27)
  silkscreen extent -31,-24 32,24
TP#1 [mm]
  oval 2x1 smd far side: 1(0,0)
TP#2 [mm]
  oval 2x1 smd: 1(0,0)
TPD [mm]
  round 1 smd: 1(0,0)
TPd [mm]
  round 1 smd: 1(0,0)
TPS610997YFFR [mm]
  round 0.2 smd: A1(-0.2,0.4) A2(0.2,0.4) B1(-0.2,0) B2(0.2,0) C1(-0.2,-0.4) C2(0.2,-0.4)
  silkscreen extent -0.77,-0.63 0.46,0.63

## Part data
BATT: library part SBatery
C1 C20 C37: library part Cap, "Capacitor"
C3 C4 C5 C6 C7 C8 C9 C11 C12 C13 C14 C15 C16 C17 C18 C19 C24 C27 C28 C33 C34 C35 C38 C40 C41 C43 C44 C46 C47 C48 C50: library part CAP, "Capacitor"
C29 C31: library part "Cap Pol3", "Polarized Capacitor (Surface Mount)"
D1: library part D
D2: library part DIODE_SCHOTTKY_0
FB2: library part INDUCTOR1
J1 J2: library part ANT
L1 L4 L5 L6: library part INDUCTOR_1
P7: "Header, 5-Pin"
Q2 Q9 Q11 Q13: library part 2N1069_1
Q3 Q8 Q10 Q12: library part NCE4060K, "NMOSFET"
Q6 Q7 Q18 Q19 Q20 Q21: library part NPN
R1: library part Res3, "Resistor"
R2 R5 R9 R10 R11 R12 R13 R14 R15 R19 R20 R21 R22 R23 R24 R25 R26 R27 R28 R29 R30 R31 R32 R33 R34 R35 R36 R37 R38 R39 R40 R41 R42 R43 R44 R45 R46 R47 R48 R49 R50 R51 R52 R65: library part RES1
R3 R6 R7: library part Res2, "Resistor"
U2: library part SIM868E/SIM868
U3: library part STM32L100R8T6, "ARM Cortex-M3 32-bit MCU, 64 KB Flash, 8 KB Internal RAM, 51 I/Os, 64-pin LQFP, -40 to 85 degC, Tray"
U8: library part SAFFB1G56KBOFA
U10: library part bq2410
U12: library part REF3012
Y1 Y2: library part XTAL, "Crystal Oscillator"

## Via types
v1: diameter 0.508, hole 0.305, Top Layer to Bottom Layer, tented both sides, 216 vias
v2: diameter 0.762, hole 0.508, Top Layer to Bottom Layer, tented both sides, 21 vias
v3: diameter 1.016, hole 0.635, Top Layer to Bottom Layer, tented both sides, 7 vias

## Nets (pads, with @x,y where several pads share a name; then routed paths per layer and width w, separated by ;. In a path a pad name is that pad's centre, name@x,y a point inside that pad or via, vN(x,y) a via of type N, cw(c..) or ccw(c..) an arc to the next point about the centre after c; other vN are vias at no path point)
2.5V: C1.1 C9.2 U3.13 U12.2 | length 15
  Top Layer w0.203: U3.13@27.701,12.567 v1@29.082,12.567
  Mid-Layer 2 w0.508: v1(29.082,12.574) 29.838,13.33 29.838,17.443 v1(29.309,17.972)
  Bottom Layer w0.508: C1.1@27.679,24.417 27.679,23.278 C9.2@27.595,23.195 26.996,22.596 U12.2@26.996,21.783 29.309,19.47 v1(29.309,17.972)
AGND: BATT.1 C1.2 C3.2 C4.1 C5.2 C6.1 C7.2 C8.1 C9.1 C11.1 C12.1 C13.1 C14.1 C15.1 C16.1 C17.1 C18.1 C19.1 C24.1 C27.2 C28.2 C29.2 C31.2 C33.1 C34.2 C35.1 C37.2 C38.1 C40.2 C41.1 C43.1 C44.2 C46.2 C47.2 C48.2 C50.1 D2.1 D3.1 D4.1 J1.2 J2.2 P7.3 Q2.2 Q3.1 Q9.2 Q11.2 Q13.2 R3.2 R5.2 R9.2 R11.2 R13.2 R15.1 R20.1 R35.1 R38.1 R48.1 R52.1 T6.1 T7.1 T8.1 T13.1 T14.1 T16.1 T20.1 U2.8 U2.13 U2.19 U2.21 U2.27 U2.30 U2.31 U2.33 U2.36 U2.37 U2.45 U2.63 U2.66 U2.67 U2.69 U2.70 U2.71 U2.72 U2.73 U2.74 U2.75 U2.76 U2.77 U3.12 U3.18 U3.31 U3.47 U3.63 U8.2 U8.3 U8.5 U9.1 U9.2 U10.3 U10.11 U11.1 U11.9 U12.3 U13.6 U13.8 U14.1 U14.2 U14.3 U14.6 U14.7 U15.3 U15.5 U15.8 U15.9 U16.10 U17.4 U18.A2 U18.C2 U19.4 | length 115.3
  Top Layer w0.152: v1(2.483,7.739) 3.851,6.371 R38.1@3.851,5.829 ; C13.1@11.76,6.593 12.39,7.223 13.869,7.223 14.024,7.067 U3.47@15.201,7.067 ; U2.73@16.53,35.866 U2.72@19.43,35.866 ; U2.63@16.63,26.166 16.63,28.966 U2.75@16.53,29.066 ; U2.66@20.83,26.166 U2.67@22.23,26.166 22.23,28.966 U2.69@22.33,29.066 ; U2.45@24.781,30.375 23.64,30.375 U2.69@22.33,29.066 ; C12.1@32.154,4.348 32.629,4.348 33.025,3.953 33.025,3.261 33.258,3.028 34.625,3.028 34.853,3.257 C7.2@34.853,3.783 ; U9.1@33.511,24.744 U9.2@34.011,24.744 ; U8.5@38.398,25.027 U8.2@38.398,24.452 U8.3@38.873,24.452 ; U2.75@16.53,29.066 U2.76@19.43,29.066 ; U2.75@16.53,29.066 U2.74@16.53,32.466 U2.77@19.43,32.466 ; U2.76@19.43,29.066 U2.77@19.43,32.466 ; U2.76@19.43,29.066 U2.69@22.33,29.066 ; U2.77@19.43,32.466 U2.72@19.43,35.866 ; U2.77@19.43,32.466 U2.70@22.33,32.466 ; U2.72@19.43,35.866 U2.71@22.33,35.866 U2.70@22.33,32.466 ; U2.69@22.33,29.066 U2.70@22.33,32.466
  Top Layer w0.254: v1(0.9,20.209) U14.2@1.483,20.209 ; v1(1.089,28.337) 1.089,28.057 U15.8@1.482,27.664 U15.9@1.482,27.164 ; U14.3@1.483,19.709 U14.1@1.483,20.709 ; U13.8@2.562,13.396 2.562,13.133 2.812,12.883 U13.6@3.075,12.883 3.676,12.883 4.052,13.259 C40.2@4.411,13.259 ; U15.3@3.007,26.664 3.007,26.29 v1(3.4,25.897) ; U15.5@3.007,27.664 3.157,27.813 v1(3.157,28.388) ; C41.1@3.113,16.797 3.113,16.813 2.113,17.813 2.113,18.327 2.633,18.847 U14.6@2.633,19.049 U14.7@3.133,19.049 ; C38.1@4.544,16.811 4.544,16.356 4.544,15.375 v1(5.321,14.598) ; v1(14.788,17.858) 15.567,17.858 17.807,17.858 18.201,17.464 U3.31@18.201,16.567 ; U3.47@15.201,7.067 17.142,7.067 v1(17.934,6.274) ; v1(23.335,6.237) 24.701,4.872 U3.63@24.701,4.067 ; U3.18@24.701,16.567 24.701,14.916 24.967,14.649 25.456,14.649 v1(25.77,14.963) ; v1(26.453,11.913) 26.606,12.067 U3.12@27.701,12.067
  Bottom Layer w0.152: v1(2.483,7.739) U18.C2@3.002,7.22
  Bottom Layer w0.203: C46.2@5.317,8.891 5.317,10.194 5.944,10.82 8.101,10.82 U10.11@8.25,10.969 U10.3@8.25,12.069 ; v1(36.191,35.261) 36.401,35.472 C16.1@37.014,35.472 ; C14.1@37.861,31.636 37.861,32.888 C18.1@37.922,32.948
  Bottom Layer w0.254: v1(1.634,23.622) 1.862,23.394 2.421,23.394 2.87,23.843 U19.4@3.393,23.843 ; U18.A2@3.802,7.22 5.317,8.736 C46.2@5.317,8.891 ; R20.1@6.829,23.906 6.829,25.312 C47.2@6.462,25.679 v1(7.645,25.679) ; Q11.2@8.156,20.957 8.156,22.84 v1(8.727,23.411) ; R35.1@16.754,14.148 v1(16.754,14.832) ; v1(19.799,12.547) R48.1@19.799,13.226 ; v1(22.518,9.12) 23.058,9.12 ; v1@22.736,9.12 23.058,9.12 ; v1(23.268,12.665) 23.268,13.514 23.749,13.994 23.899,13.994 ; 23.824,13.92 23.899,13.994 ; C8.1@24.235,9.12 23.058,9.12 ; R5.2@24.283,12.775 24.283,13.611 23.899,13.994 ; C3.2@24.299,13.994 23.899,13.994 ; C37.2@27.996,18.462 27.996,18.158 v1(29.022,17.133) ; U12.3@29.496,20.783 v1(30.119,21.406)
  Bottom Layer w0.762: T16.1@14.425,1.304 14.425,2.335 D4.1@15.603,3.513
  other v1: 17.213,0.921 25.781,1.067 27.127,1.092 10.82,1.125 4.064,1.575 5.156,2.591 37.668,3.861 39.649,3.962 6.629,4.115 16.84,4.166 0.991,4.216 41.478,4.216 26.619,5.029 13.335,5.309 18.11,8.23 0.674,9.266 29.362,9.779 19.66,9.83 18.517,10.77 7.75,10.969 29.134,11.532 7.061,14.021 6.121,14.275 28.981,14.427 26.594,15.977 28.804,16.053 39.853,16.51 31.09,17.094 38.964,17.551 2.309,17.617 34.646,17.678 9.672,17.844 40.31,18.11 32.08,18.212 6.147,18.313 35.636,18.39 41.783,18.999 37.922,19.202 24.409,19.355 10.312,19.482 6.706,19.685 37.49,20.142 14.808,20.193 13.487,20.549 24.613,20.879 15.773,21.209 14.402,21.234 23.368,21.463 5.08,21.92 38.075,22.86 7.772,24.079 41.427,24.486 9.347,25.781 41.148,25.984 30.226,27.788 7.798,28.372 6.858,29.362 15.519,29.439 40.792,30.302 2.032,30.429 1.016,30.607 30.251,30.937 9.677,31.293 41.58,31.394 23.19,31.725 40.945,31.877 1.168,32.385 30.175,33.172 16.942,33.579 18.466,33.63 41.935,33.985 18.517,34.696 17.17,34.849 42.037,35.509 1.524,36.22 2.845,36.347 8.585,36.627 15.926,36.703 42.037,37.059 32.177,37.345 1.981,37.414 2.946,37.567 1.118,38.354 2.286,38.659 27.965,39.903 10.744,40.208 39.802,40.208 28.346,41.224
  other v3: 7.284,2.002
CS: U3.50 U16.7 | length 29.3
  Top Layer w0.152: v1(18.201,2.609) U3.50@18.201,4.067 U3.50@18.201,3.395
  Mid-Layer 1 w0.152: v1(18.201,2.609) 17.468,3.341 17.468,4.47 20.181,7.184 31.909,7.184 34.601,9.875 34.601,11.765 v1(32.986,13.38)
  Bottom Layer w0.152: U16.7@31.541,13.38 v1(32.986,13.38)
DM: T2.1 U2.26 | length 33.6
  Top Layer w0.203: v1(9.834,34.116) U2.26@11.43,34.116
  Mid-Layer 2 w0.203: v1(9.834,34.116) 10.363,34.646 11.227,34.646 12.014,35.433 12.014,37.998 13.259,39.243 36.017,39.243 36.449,39.675 36.449,40.657 v1(36.009,41.097)
DP: T3.1 U2.25 | length 37.2
  Top Layer w0.203: v1@9.791,35.216 U2.25@11.43,35.216
  Mid-Layer 2 w0.203: v1(9.754,35.179) 9.246,34.671 9.246,33.553 9.404,33.395 9.977,33.395 10.82,34.239 11.582,34.239 12.497,35.154 12.497,36.373 12.497,37.795 13.462,38.76 36.297,38.76 36.957,39.421 36.957,40.555 v1(37.499,41.097)
DTR: Q7.3 R32.1 U2.6 | length 38.8
  Top Layer w0.254: U2.6@27.33,31.916 27.368,31.953 28.88,31.953 29.083,31.75 v1(29.083,31.013)
  Mid-Layer 1 w0.254: v1(13.36,30.836) 13.36,33.35 13.97,33.96 14.986,33.96 18.466,30.48 28.55,30.48 v1(29.083,31.013)
  Mid-Layer 2 w0.254: v1(12.857,21.565) 12.857,23.211 12.243,23.825 12.243,29.718 12.857,30.332 12.979,30.455 v1(13.36,30.836)
  Bottom Layer w0.254: v1(12.857,21.565) 12.857,23.296 13.259,23.698 14.286,23.698 R32.1@15.238,24.65 15.259,24.671 Q7.3@15.259,26.021
EN_3V8: R52.2 U3.36 U19.2 | length 18.2
  Top Layer w0.203: v1@11.691,13.555 v1(11.691,13.674) 12.798,12.567 U3.36@15.201,12.567
  Bottom Layer w0.203: U19.2@3.901,22.482 3.901,21.249 R52.2@3.423,20.771 3.794,20.4 3.794,18.623 7.372,15.045 8.303,14.113 11.252,14.113 v1(11.691,13.674)
EN_5V: R38.2 U3.45 U18.C1 | length 24.5
  Top Layer w0.203: v1@2.337,6.735 v1(2.252,6.82) 2.252,6.428 R38.2@2.851,5.829 ; U3.45@15.201,8.067 16.361,8.067 v1(17.373,9.079)
  Mid-Layer 1 w0.203: v1(2.252,6.82) 6.176,2.896 12.012,2.896 17.373,8.257 v1(17.373,9.079)
  Bottom Layer w0.203: v1(2.252,6.82) U18.C1@3.002,6.82
EN_5V1: R37.2 U3.35 | length 13
  Top Layer w0.203: v1(11.874,14.428) 13.235,13.067 U3.35@15.201,13.067
  Mid-Layer 1 w0.203: v1(6.529,16.859) 9.443,16.859 v1(11.874,14.428)
  Bottom Layer w0.203: R37.2@4.637,18.873 4.637,18.751 v1(6.529,16.859)
EN_5V2: R51.2 U3.37 | length 16.3
  Top Layer w0.203: v1(11.116,13.294) 12.344,12.067 U3.37@15.201,12.067
  Bottom Layer w0.203: R51.2@1.317,16.249 1.932,15.633 3.547,15.633 4.329,16.415 5.505,16.415 6.461,15.459 8.225,13.695 10.716,13.695 v1(11.116,13.294)
GPS_RXD: Q21.3 R47.1 U2.62 | length 20.4
  Top Layer w0.203: v1(29.235,29.134) 29.556,28.813 Q21.3@30.926,28.813 30.926,28.103 31.648,27.381 R47.1@31.648,26.492
  Mid-Layer 1 w0.203: v1(14.3,31.699) 16.866,29.134 v1(29.235,29.134)
GPS_TXD: Q19.2 U2.61 | length 27.5
  Top Layer w0.254: v1(38.506,29.439) 38.551,29.483 Q19.2@39.624,29.483
  Mid-Layer 1 w0.254: v1(14.3,33.045) 17.475,29.87 32.258,29.87 33.02,30.632 37.313,30.632 v1(38.506,29.439)
MDTR: Q7.2 U3.21 | length 33.7
  Top Layer w0.254: v1(22.138,14.028) 22.848,14.028 23.201,14.38 U3.21@23.201,16.567
  Mid-Layer 2 w0.254: v1(13.995,27.229) 14.853,28.087 21.016,28.087 21.584,27.519 21.584,20.763 ; 21.584,15.193 21.584,20.763 ; v1(22.138,14.028) 21.584,14.582 21.584,20.763
  Bottom Layer w0.254: v1(13.995,27.229) 14.326,27.229 15.617,28.521 Q7.2@16.259,28.521
MISO: U3.44 U16.8 | length 28.7
  Top Layer w0.152: U3.44@15.201,8.567 16.02,8.567 17.522,10.069 v1@18.505,10.069
  Mid-Layer 1 w0.152: v1(18.52,10.054) 20.79,7.785 27.25,7.785 31.962,7.785 34.23,10.053 34.23,11.443 32.271,13.402 32.271,13.935 v1(32.986,14.65)
  Bottom Layer w0.152: U16.8@31.541,14.65 v1(32.986,14.65)
MOSI: U3.57 U16.15 | length 22.9
  Top Layer w0.152: U3.57@21.701,4.067 21.701,2.324 v1(22.005,2.019)
  Mid-Layer 1 w0.152: v1(22.005,2.019) 24.403,4.417 33.164,4.417 35.115,6.369 38.145,6.369 v1(38.806,7.03)
  Bottom Layer w0.152: v1(38.806,7.03) U16.15@40.691,7.03
MRI: Q6.3 R30.1 U3.22 | length 13.9
  Top Layer w0.254: v1@22.701,14.657 U3.22@22.701,16.567
  Mid-Layer 2 w0.254: v1(22.327,21.844) 22.328,15.003 v1(22.687,14.643)
  Bottom Layer w0.254: v1(22.327,21.844) 23.446,22.964 R30.1@23.446,24.732 23.474,24.76 Q6.3@23.474,26.014
NBIOT_GRXD: Q19.3 R43.1 U3.17 | length 25.1
  Top Layer w0.254: U3.17@25.201,16.567 26.412,16.567 v1(26.979,17.133) ; Q19.3@37.124,28.483 37.124,29.656 37.516,30.048 37.516,30.81 R43.1@37.617,30.912
  Mid-Layer 2 w0.254: v1(26.979,17.133) 27.372,17.526 27.372,21.946 32.127,26.701 32.127,29.155 33.528,30.556 35.966,30.556 37.135,29.388 v1(37.135,29.185)
NBIOT_GTXD: Q21.2 U3.16 | length 19.8
  Top Layer w0.254: U3.16@27.701,14.067 27.701,16.476 v1@28.223,16.998 ; Q21.2@33.426,29.813 34.652,29.813 v1(34.671,29.794)
  Mid-Layer 2 w0.254: v1(28.217,17.025) 28.217,20.254 31.496,23.533 31.496,24.816 34.671,27.991 v1(34.671,29.794)
NBIOT_NRXD: Q18.3 R42.1 U3.59 | length 34.8
  Top Layer w0.254: U3.59@22.701,4.067 22.701,5.65 v1(22.702,5.652)
  Mid-Layer 1 w0.254: v1@22.701,5.675 33.785,5.675 v1(34.929,6.819)
  Mid-Layer 2 w0.254: v1(34.432,23.809) 33.86,23.236 33.86,21.184 33.86,12.956 34.929,11.887 v1(34.929,6.819)
  Bottom Layer w0.254: v1@34.467,23.79 Q18.3@35.569,23.79 35.569,24.66 35.851,24.941 R42.1@35.851,25.411
NBIOT_NTXD: Q20.2 U3.58 | length 29.5
  Top Layer w0.254: U3.58@22.185,4.016 v1(22.185,6.08)
  Mid-Layer 2 w0.254: v1(20.176,27.04) 20.578,26.638 20.578,20.392 15.877,15.691 15.877,11.81 21.606,6.08 v1(22.185,6.08)
  Bottom Layer w0.254: v1(20.176,27.04) 20.578,27.442 Q20.2@20.578,28.331
NET: J1.1 U2.32 | length 14.5
  Top Layer w0.508: J1.1@6.748,38.763 J1.1@6.748,39.008 6.748,38.195 ccw(c9.288,38.195) 7.492,36.399 8.026,35.865 cw(c6.677,34.516) 8.585,34.516 8.585,29.209 ccw(c10.667,29.209) 9.195,27.737 ccw(c9.728,28.27) 9.332,27.628 ccw(c9.728,28.27) 9.728,27.516 U2.32@11.43,27.516
NET_LIGHT: LED1.1 U2.41 | length 10.9
  Top Layer w0.203: U2.41@22.68,23.566 22.68,22.582 23.241,22.022 28.753,22.022 29.21,22.479 30.81,22.479 31.344,21.946 31.344,21.361 LED1.1@31.344,21.285
NetBATT_2: BATT.2 R7.2 U3.1 | length 10.3
  Top Layer w0.254: v1(25.89,5.036) 25.89,5.846 26.61,6.567 U3.1@27.701,6.567
  Bottom Layer w0.508: 18.912,4.806 19.254,4.463 BATT.2@22.149,4.463 25.317,4.463 v1(25.89,5.036)
NetC3_1: C3.1 R2.2 R5.1 U3.8 | length 6
  Top Layer w0.254: v1@25.266,11.963 25.266,10.813 26.013,10.067 U3.8@27.701,10.067
  Bottom Layer w0.254: v1(25.241,11.956) 25.241,12.733 R5.1@25.283,12.775 25.283,13.978 C3.1@25.299,13.994
NetC4_2: C4.2 R1.1 U3.5 Y2.1 | length 15.4
  Top Layer w0.152: U3.5@27.701,8.567 29.829,8.567 32.851,11.589 35.231,11.589 R1.1@35.585,11.235 37.896,11.235 Y2.1@38.992,10.139 40.562,10.139 C4.2@41.079,10.656
NetC5_1: C5.1 U3.4 Y1.2 | length 8.1
  Top Layer w0.152: U3.4@27.701,8.067 30.392,8.067 31.529,6.93 32.131,6.93 32.773,7.572 Y1.2@33.36,7.572 33.36,8.526 C5.1@33.894,9.059
NetC6_2: C6.2 R1.2 U3.6 Y2.3 | length 13.2
  Top Layer w0.152: U3.6@27.701,9.067 U3.6@27.785,9.067 ; U3.6@27.724,9.006 U3.6@27.785,9.067 ; C6.2@37.295,14.566 37.295,12.372 Y2.3@37.279,12.356 35.706,12.356 R1.2@35.585,12.235 35.447,12.235 35.142,11.929 32.735,11.929 29.873,9.067 U3.6@27.785,9.067